# Altium PCB Rackmount_DSP.PcbDoc (part 17 of 24)
Units mil, origin at the board's own origin, x right, y up, seen from the top; angles counter-clockwise.
Board outline 10629.92 x 8267.72 mil, 4 copper layers (Top Layer, Mid Layer 1, Mid Layer 2, Bottom Layer), stack 36.2 mil thick; 4500 components, 1565 nets, 9765 pads, 3289 vias.
Unrouted connection lines stored in the file: 1.
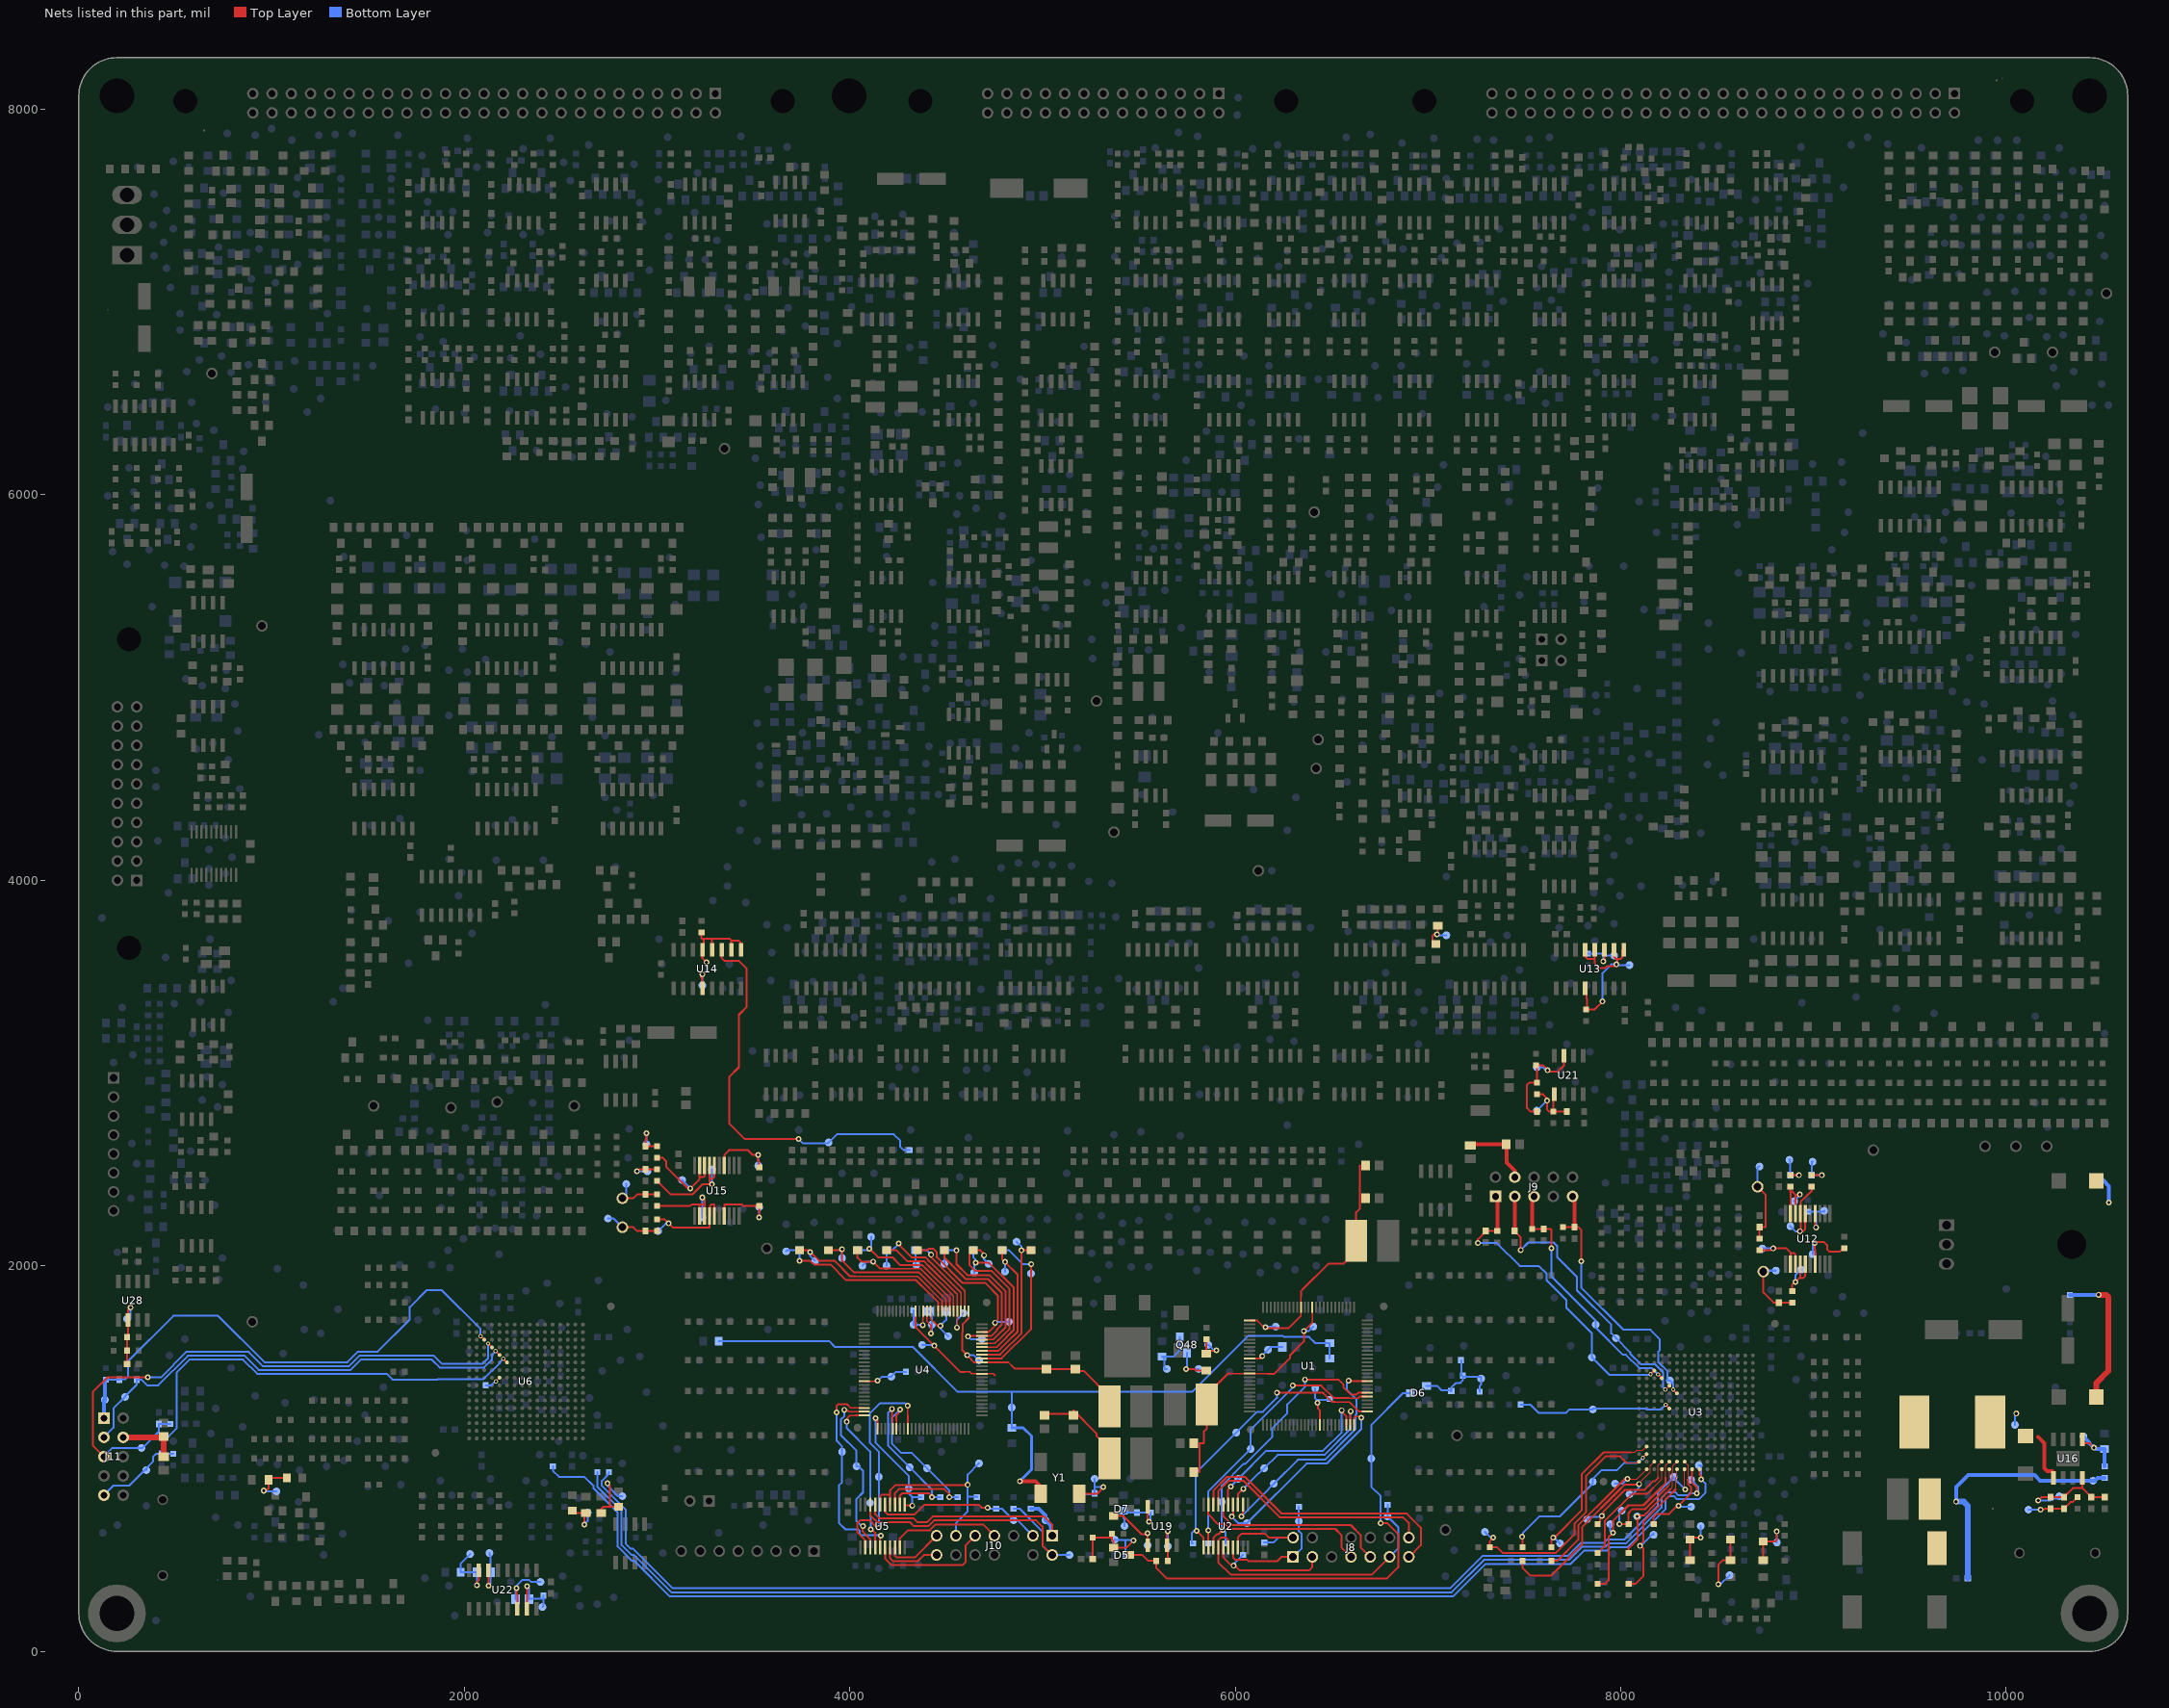
[diagram p19: the nets of this part, all layers, seen from the top]

## Via types
v1: diameter 30, hole 16, Top Layer to Bottom Layer, 3143 vias
v2: diameter 22, hole 12, Top Layer to Bottom Layer, 146 vias

## Nets (pads, with @x,y where several pads share a name; then routed paths per layer and width w, separated by ;. In a path a pad name is that pad's centre, name@x,y a point inside that pad or via, vN(x,y) a via of type N, cw(c..) or ccw(c..) an arc to the next point about the centre after c; other vN are vias at no path point) (continued)
XSIG030817: C20.1 TP852.1 U1.36 | length 197.6
  Top Layer w9: U1.36@6074.88,1519.37 6128.46,1519.37 v1(6140.23,1531.14)
  Bottom Layer w10: v1(6140.23,1531.14) 6140.23,1535.23 TP852.1@6170,1565 6185,1580 C20.1@6245,1580
XSIG030821: R605.1 TP853.1 U1.66 | length 269.2
  Top Layer w9: v1(6426.87,1289.61) 6429.2,1289.61 6429.2,1257.78 6439.06,1247.92 U1.66@6439.06,1174.88
  Bottom Layer w10: TP853.1@6415,1365 6415,1312.17 6423.6,1303.57 v1@6426.87,1303.57 ; v1(6426.87,1289.61) v1@6426.87,1303.57 ; R605.1@6490,1310 6489,1310 6482.57,1303.57 v1@6426.87,1303.57
XSIG030825: TP396.1 U1.84 U2.2 | length 1221.1
  Top Layer w9: v1(6587.74,1403.62) 6587.74,1401.26 U1.84@6685.12,1401.26
  Top Layer w10: v1(6031.94,700.58) 6039.57,708.21 U2.2@6039.57,761.61
  Bottom Layer w10: v1(6031.94,700.58) 6175.25,843.89 6175.25,845.25 TP396.1@6200,870 6324.12,994.12 6465.4,994.12 6623.73,1152.45 6623.73,1226.12 6629.21,1231.59 6629.21,1306.07 6579.48,1355.8 6579.48,1395.35 v1(6587.74,1403.62)
XSIG030826: TP395.1 U1.74 U2.3 | length 942.8
  Top Layer w9: U1.74@6596.54,1174.88 6596.54,1242.65 v1(6599.21,1245.32)
  Top Layer w10: U2.3@6013.98,761.61 6013.98,815.72 v1(6041.61,843.35)
  Bottom Layer w10: v1(6041.61,843.35) 6123.51,925.25 6125.25,925.25 TP395.1@6150,950 6219.49,1019.49 6462.49,1019.49 6596.24,1153.24 6596.24,1245.32 v1(6599.21,1245.32)
XSIG030827: TP394.1 U1.75 U2.4 | length 1095.6
  Top Layer w9: U1.75@6616.22,1174.88 6616.22,1211.96 6622.43,1218.17 6653.73,1218.17 v1(6653.73,1212.39)
  Top Layer w10: v1(5981.48,699.03) 5988.39,705.94 U2.4@5988.39,761.61
  Bottom Layer w10: v1(5981.48,699.03) 6015.51,665 TP394.1@6060,665 6369.12,974.12 6473.68,974.12 6653.73,1154.16 v1(6653.73,1212.39)
XSIG030828: TP854.1 U1.73 U2.5 | length 994.2
  Top Layer w9: v1(6552.43,1250.37) 6550.72,1250.37 6550.72,1245.02 6576.85,1218.88 U1.73@6576.85,1174.88
  Top Layer w10: U2.5@5962.8,761.61 5962.8,840.24 v1(5977.38,854.82)
  Bottom Layer w10: v1(5977.38,854.82) 5977.38,857.38 TP854.1@6015,895 6160.32,1040.32 6455.04,1040.32 6551.51,1136.79 6551.51,1250.37 v1(6552.43,1250.37)
XSIG030829: R21.2 TP393.1 U1.80 U2.12 | length 1507.4
  Top Layer w9: 6588.75,1313.39 6637.02,1313.39 6646.15,1322.52 U1.80@6685.12,1322.52
  Top Layer w10: U2.12@5860.43,538.39 v1(5860.43,627.11) ; v1(6298.05,1379.17) 6445.91,1379.17 6511.69,1313.39 6588.75,1313.39
  Bottom Layer w10: R21.2@5860,560 5860,593.34 5860.43,593.77 v1(5860.43,627.11) 5860.43,830.43 TP393.1@6080,1050 6080,1151.15 6298.05,1369.2 v1(6298.05,1379.17)
XSIG030830: R22.2 TP392.1 U1.81 U2.13 | length 1530.9
  Top Layer w9: 6588.61,1342.51 6598.72,1332.39 6629.15,1332.39 6638.96,1342.2 U1.81@6685.12,1342.2
  Top Layer w10: U2.13@5886.02,538.39 5886.02,589.39 5905.07,608.43 5914.3,608.43 v1(5935.51,629.64) ; v1(6361.67,1410.51) 6533.91,1410.51 6561.99,1382.43 6561.99,1369.12 6588.61,1342.51
  Bottom Layer w10: R22.2@5950,560 5950,615.15 v1(5935.51,629.64) 5930,629.64 TP392.1@5930,775 5930,859.5 6043,972.5 6052,972.5 6192,1112.5 6192,1158.06 6270,1236.06 6270,1281.29 6361.67,1372.96 v1(6361.67,1410.51)
XSIG030831: J8.11 R24.2 TP855.1 U2.14 U2.16 | length 1480.5
  Top Layer w10: U2.16@5962.8,538.39 5962.8,579.48 5952.89,589.39 5924.99,589.39 5911.61,576.01 U2.14@5911.61,538.39 5911.61,462.41 5975.84,398.18 6709.1,398.18 6800,489.07 J8.11@6800,490
  Bottom Layer w10: R24.2@6790,760 TP855.1@6790,700 6845,645 6845,535 J8.11@6800,490
XSIG030833: J8.1 R19.2 TP856.1 U2.17 | length 665
  Top Layer w10: U2.17@5988.39,538.39 5988.39,487.39 6001.49,474.28 6062.05,474.28 6068.83,467.5 6216.6,467.5 6239.1,490 J8.1@6300,490
  Bottom Layer w10: J8.1@6300,490 6345,535 6345,608.64 6330,623.64 TP856.1@6330,675 R19.2@6330,750
XSIG030835: J8.3 R23.2 TP857.1 U2.15 | length 678.6
  Top Layer w10: U2.15@5937.2,538.39 5937.2,487.39 5980.31,444.28 v1(5990.66,444.28) 5997.55,444.28 6021.35,420.49 6384.37,420.49 6400,436.12 J8.3@6400,490
  Bottom Layer w10: v1(5990.66,444.28) 5990.66,451.66 6039,500 R23.2@6040,500
XSIG030842: J8.7 TP858.1 U2.9 | length 919.2
  Top Layer w10: U2.9@5860.43,761.61 5860.43,710.61 5911.41,659.64 5947.94,659.64 5972.58,634.99 6173.42,634.99 ; 6173.43,635 6518.64,635 6550,603.64 6550,540 J8.7@6600,490
XSIG030843: J8.9 TP859.1 U2.6 | length 948.2
  Top Layer w10: U2.6@5937.2,761.61 5937.2,700.88 5983.09,654.99 6165.14,654.99 6598.64,655 6650,603.64 6650,540 J8.9@6700,490
XSIG030844: J8.13 TP860.1 U2.8 | length 1466.1
  Top Layer w10: U2.8@5886.02,761.61 5886.02,834.18 5956.67,904.82 6051.33,904.82 6241.39,714.76 6889.67,714.76 6962.53,641.9 6962.53,550.73 6901.8,490 J8.13@6900,490
XSIG030845: J8.14 TP861.1 U2.7 | length 1247.3
  Top Layer w10: U2.7@5911.61,761.61 5911.61,831.48 5964.96,884.82 6042.57,884.82 6232.63,694.76 6871.81,694.76 6900,666.57 J8.14@6900,590
XSIG030846: J8.2 R25.1 TP862.1 U2.18 | length 515.3
  Top Layer w10: U2.18@6013.98,538.39 6013.98,592.08 6031.28,609.39 6155.33,609.39 6174.71,590 J8.2@6300,590
  Bottom Layer w10: R25.1@6150,565 6197.77,565 6222.77,590 TP862.1@6300,590
XSIG030850: R20.1 TP391.1 U1.76 U2.11 | length 1607.5
  Top Layer w9: 6515.89,1293.38 6592.87,1293.38 6642.46,1243.78 U1.76@6685.12,1243.78
  Top Layer w10: v1(5798.78,625.42) 5834.84,589.39 U2.11@5834.84,538.39 ; v1(6215.45,1341.19) 6455.6,1341.19 6503.42,1293.38 6515.89,1293.38
  Bottom Layer w10: R20.1@5780,560 5775.02,560 5775.02,614.43 5786.01,625.42 v1@5795.17,625.42 ; v1(5798.78,625.42) v1@5795.17,625.42 ; v1(6215.45,1341.19) 6215.45,1314.88 6143.36,1242.79 6112.79,1242.79 TP391.1@6005,1135 5795.17,925.17 v1@5795.17,625.42
XSIG030853: C17.1 C38.1 L3.2 TP863.1 U1.12 U1.40 | length 1311.7
  Top Layer w9: 5974.88,1440.63 6040,1440.63 U1.40@6074.88,1440.63 6166.99,1440.63 6167.62,1440 6174.25,1440 ; v1(6355.44,1661.15) 6399.69,1705.39 U1.12@6399.69,1785.12
  Top Layer w10: 5815,930 5815,1080 5837.28,1080 5837.28,1141.1 5852.68,1156.5 L3.2@5852.68,1280 5852.68,1331.5 5961.81,1440.63 5974.88,1440.63 ; 6174.25,1440 6202.62,1440 6285,1522.38 6285,1536.65 6355.44,1607.09 v1(6355.44,1661.15)
  Bottom Layer w10: v1(6355.44,1661.15) 6381.15,1661.15 TP863.1@6405,1685
XSIG030857: C18.1 C19.1 L1.2 TP864.1 U1.15 U1.26 | length 1314.9
  Top Layer w9: U1.26@6074.88,1716.22 6113.97,1716.22 6149.24,1680.96 v1(6157.13,1680.96) 6157.13,1677.29 6276.8,1677.29 6340.63,1741.12 U1.15@6340.63,1785.12 6340.63,1835 6340.63,1843.31 6341.31,1843.99 6341.31,1869.2 6348.93,1876.82
  Top Layer w10: 6348.93,1876.82 6483.01,2010.89 6559.72,2010.89 6627.32,2078.5 L1.2@6627.32,2130 6627.32,2277.32 6645,2295 6645,2350 6645,2520
  Bottom Layer w10: v1(6157.13,1680.96) 6157.47,1680.96 6161.52,1685 TP864.1@6210,1685
XSIG040037: C359.1 J9.1 R862.1 TP390.1 U3.P3 | length 1647.3
  Top Layer w10: v1(7259,2118.44) 7259,2137.5 7300,2178.5 C359.1@7300,2180 R862.1@7360,2180 ; v2(8154.45,1437.28) 8158.62,1441.44 8158.62,1441.69 U3.P3@8173.46,1456.54
  Top Layer w20: J9.1@7350,2360 7360,2350 R862.1@7360,2180
  Bottom Layer w10: v1(7259,2118.44) 7357.58,2118.44 7476.36,1999.66 7574.84,1999.66 7615,1959.5 7615,1924.5 7717.45,1822.05 7717.45,1783.2 7850,1650.65 TP390.1@7850,1525 7939.84,1435.16 8154.45,1435.16 v2(8154.45,1437.28)
XSIG040039: C351.1 J9.5 R748.2 TP389.1 U3.N4 | length 1329
  Top Layer w10: R748.2@7540,2190 C351.1@7600,2190 7636.93,2190 7640,2186.93 v1(7640,2091) ; v2(8193.15,1436.85) U3.N4@8212.83,1417.17
  Top Layer w20: R748.2@7540,2190 7540,2350 J9.5@7550,2360
  Bottom Layer w10: v1(7640,2091) 7640,1944.3 7870,1714.3 TP389.1@7870,1695 7870,1680.5 8011.92,1538.58 8026.37,1538.58 8095.36,1469.59 8160.41,1469.59 v2(8193.15,1436.85)
XSIG040042: C352.1 J9.9 R704.2 TP388.1 U3.L6 | length 1412.1
  Top Layer w10: R704.2@7700,2200 C352.1@7760,2200 7780.86,2200 7794.39,2186.47 v1(7794.39,2023.4) ; v2(8271.89,1358.11) U3.L6@8291.57,1338.43
  Top Layer w20: J9.9@7750,2360 7760,2350 C352.1@7760,2200
  Bottom Layer w10: v1(7794.39,2023.4) 7794.39,1888.07 8014.61,1667.85 8153.55,1667.85 8201.13,1620.27 8201.13,1561.44 8194.51,1554.83 8194.51,1500.54 8242.82,1452.23 8242.82,1405 TP388.1@8255,1405 8271.89,1388.11 v2(8271.89,1358.11)
XSIG040044: C440.1 J9.3 TP399.1 U3.M5 | length 1552.7
  Top Layer w6: v2(8231.7,1357.85) 8238.21,1364.36 8238.77,1364.36 U3.M5@8252.2,1377.8
  Top Layer w10: C440.1@7450,2180 7450,2178.5 7481.39,2147.11 v1(7481.39,2082.29)
  Top Layer w20: C440.1@7450,2180 J9.3@7450,2360
  Bottom Layer w10: v1(7481.39,2082.29) 7520.1,2121 7652.43,2121 7670,2103.43 7670,2044.82 7772.6,1942.22 7772.6,1872.6 7950.25,1694.95 7950.25,1649.75 TP399.1@7975,1625 8049.04,1550.96 8049.04,1544.19 8103.64,1489.59 8177.18,1489.59 8219.59,1447.18 8219.59,1369.96 v2(8231.7,1357.85)
XSIG040070: C335.1 J9.4 L7.2 TP865.1 | length 382.5
  Top Layer w20: L7.2@7220,2624.5 7220,2630.92 7394.48,2630.92 7394.48,2630 C335.1@7405,2630 7407.65,2630 7407.65,2535.78 7450,2493.43 J9.4@7450,2460
XSIG040178: R875.2 TP1743.1 U3.K15 | length 528.4
  Top Layer w6: U3.K15@8330.94,984.09 8350.36,964.68 8350.36,931.61 8350,931.25 8350,891.95
  Top Layer w10: R875.2@8170,660 8170,697.27 8185.42,712.69 8250.82,712.69 8293.73,755.6 v1(8299.89,755.6) 8364.78,820.5 8364.78,835 8364.78,851.72 8351.34,865.16 8351.34,867.02 8350,868.36 8350,891.95
  Bottom Layer w10: v1(8299.89,755.6) 8305.5,750 TP1743.1@8365,750
XSIG040179: R877.2 TP1657.1 U3.L16 | length 843
  Top Layer w6: 8284.36,839.83 8286.55,842.02 8286.55,900.65 8291.57,905.67 U3.L16@8291.57,944.72
  Top Layer w10: R877.2@8040,350 8076.35,350 8117.5,391.15 8117.5,532.91 8103.69,546.72 v1(8099.88,546.72) 8099.88,553.9 8117.5,571.52 8117.5,672.97 8150,705.47 8150,705.56 8177.14,732.69 8177.22,732.69 8232.27,787.74 8232.27,787.88 8249.85,805.45 8249.98,805.45 8279.53,835 8284.36,839.83
  Bottom Layer w10: v1(8099.88,546.72) 8103.54,546.72 8170,613.18 TP1657.1@8170,605
XSIG040180: R879.2 TP1659.1 U3.L15 | length 627.8
  Top Layer w6: 8259.52,843.28 8268.67,852.44 8268.67,934.32 8271.2,936.85 8271.2,963.72 U3.L15@8291.57,984.09
  Top Layer w10: R879.2@8040,510 8040,534.31 8087.62,581.93 8087.62,681.46 8091.77,685.61 8091.77,697.01 8085,697.01 v1(8085,700) 8091.77,700 8091.77,705.54 8121.77,705.54 8130,713.77 8130,713.84 8168.85,752.69 8168.92,752.69 8212.27,796.04 8212.27,796.16 8241.56,825.45 8241.68,825.45 8251.23,835 8259.52,843.28
  Bottom Layer w10: TP1659.1@8085,690.24 TP1659.1@8089.88,695.12 ; v1(8085,700) 8085,697.01 8087.99,697.01 TP1659.1@8089.88,695.12 ; TP1659.1@8091.77,697.01 TP1659.1@8089.88,695.12
XSIG040181: R881.2 TP1658.1 U3.M16 | length 541.4
  Top Layer w6: 8242.35,854.58 8252.2,864.44 U3.M16@8252.2,944.72
  Top Layer w10: v1(7993.32,660) R881.2@8040,660 8040,717.56 8059.25,736.81 8124.58,736.81 8222.76,835 8242.35,854.58
  Bottom Layer w10: v1(7993.32,660) 7993.32,720.72 7998.8,726.2 7995,730 TP1658.1@8005,730
XSIG040182: R883.2 TP1660.1 U3.M15 | length 908.7
  Top Layer w6: 8232.83,903.46 8232.83,930.83 8233.2,931.2 8233.2,965.09 U3.M15@8252.2,984.09
  Top Layer w10: R883.2@7880,350 7918.25,350 7936.89,368.64 7936.89,592.55 v1(7959.04,614.7) 7959.04,677.01 8039.57,757.54 8117.02,757.54 8194.48,835 8232.83,873.36 8232.83,903.46
  Bottom Layer w10: TP1660.1@7945,660 7945,626.11 7956.42,614.7 v1(7959.04,614.7)
XSIG040183: R885.2 U3.N16 | length 619.1
  Top Layer w6: 8169.16,849.06 8212.83,892.73 U3.N16@8212.83,944.72
  Top Layer w10: R885.2@7880,510 7881,510 7916.89,545.89 7916.89,675.25 8059.87,818.23 8138.33,818.23 8155.1,835 8169.16,849.06
XSIG040184: R887.2 TP867.1 U3.N15 | length 621.7
  Top Layer w6: 8193.83,903.09 8193.83,965.09 U3.N15@8212.83,984.09
  Top Layer w10: R887.2@7880,660 7892.16,672.16 7892.16,688.98 7901.15,697.97 v1@7901.15,699.97 ; 8193.83,903.09 8193.83,899.19 8178.15,883.5 8169.16,883.5 8123.89,838.23 8022.35,838.23 8019.12,835 7908.93,724.81 7908.93,703 v1(7901.15,703) ; v1@7901.15,699.97 v1(7901.15,703) ; v1@7901.15,699.97 v1(7901.15,703)
  Bottom Layer w10: TP867.1@7825,685 7827.69,685 7829.16,683.52 7844.27,698.63 7901.15,698.63 7901.15,699.97 v1(7901.15,703)
XSIG040185: R886.2 TP868.1 U3.P15 | length 1142.7
  Top Layer w6: v1@8095.8,866.25 v1(8095.8,868.23) 8095.8,872.88 8153.09,930.18 8153.09,963.72 U3.P15@8173.46,984.09
  Top Layer w10: R886.2@7490,470 7490,434.56 7532.51,392.05 7637.72,392.05 7799.18,553.5 7799.18,644.33 7989.85,835 8019.09,864.24 8095.8,864.24 v1@8095.8,866.25
  Bottom Layer w10: TP868.1@8045,815 8060,815 8095.8,850.8 v1(8095.8,868.23)
XSIG040233: R876.1 TP398.1 U3.M8 | length 823.5
  Top Layer w10: v2(8232.52,1279.37) U3.M8@8252.2,1259.68
  Bottom Layer w10: R876.1@7480,1280 7530.28,1280 7572.51,1237.77 7716.9,1237.77 7734.13,1255 TP398.1@7855,1255 7855,1260 8130.44,1260 8137.07,1253.37 8206.52,1253.37 v2(8232.52,1279.37)
XSIG040238: D47.1 R1079.2 TP869.1 | length 268.9
  Top Layer w10: D47.1@8740,473.5 R1079.2@8740,570 8800.79,570 8809,578.21 v1(8809,621.42)
  Bottom Layer w10: v1(8809,621.42) 8810,620.42 TP869.1@8810,565
XSIG040265: R878.2 TP870.1 U3.R13 | length 892.2
  Top Layer w6: 8054.51,1032.67 8072.82,1032.67 8083.3,1043.15 8114.41,1043.15 U3.R13@8134.09,1062.83
  Top Layer w10: R878.2@7640,540 7640,581.31 v1(7649,590.31) 7655.66,590.31 7797.16,731.81 7797.16,917.59 7912.24,1032.67 7955,1032.67 8054.51,1032.67
  Bottom Layer w10: v1(7649,590.31) 7654.69,590.31 TP870.1@7685,560
XSIG040266: R880.2 TP397.1 U3.R14 | length 907
  Top Layer w10: v1(7487.27,593.95) 7490,593.95 R880.2@7490,540 ; v2(8114.41,1003.78) U3.R14@8134.09,1023.46
  Bottom Layer w10: v1(7487.27,593.95) 7490,593.95 7491.56,595.51 7491.56,614.4 7578.21,701.05 7685.08,701.05 7855,870.97 TP397.1@7855,880 7855.67,880 7856.12,880.45 7856.12,896.17 7898.61,938.66 7979.57,938.66 8016.94,976.03 8086.66,976.03 v2(8114.41,1003.78)
XSIG040267: R882.2 TP871.1 U3.T15 | length 1266.4
  Top Layer w6: 8028.62,979.63 8090.26,979.63 U3.T15@8094.72,984.09
  Top Layer w10: v1(7338.49,590.56) 7320,572.07 R882.2@7320,540 7358.06,540 7389.06,509 7661.21,509 7759.18,606.96 7759.18,662.1 7819.32,722.25 7819.32,909.19 7921.57,1011.43 7955,1011.43 7996.82,1011.43 8028.62,979.63
  Bottom Layer w10: TP871.1@7295,620 7324.44,590.56 v1(7338.49,590.56)
XSIG040268: R884.2 TP872.1 U3.R16 | length 808.9
  Top Layer w6: v1(8034.27,894.77) 8084.14,894.77 U3.R16@8134.09,944.72
  Top Layer w10: R884.2@7640,470 7670,470 7779.18,579.18 7779.18,653.72 7960.45,835 8020.22,894.77 v1(8034.27,894.77)
  Bottom Layer w10: TP872.1@7970,870 8009.5,870 v1(8034.27,894.77)
XSIG040270: R63.2 TP1740.1 U3.K16 | length 6451.4
  Top Layer w6: U3.K16@8330.94,944.72 8330.94,839.23 v1(8334.61,839.23)
  Bottom Layer w10: R63.2@2750,930 2750,921.29 2713.03,884.32 2713.03,859.15 2836.34,735.84 2836.34,558.67 2861.9,533.11 2874.68,533.11 3081.06,326.74 7114.68,326.74 7281.99,494.05 7723.77,494.05 7793.61,563.89 7912.82,563.89 7928.93,580 8017.19,580 8191,753.81 8191,821 TP1740.1@8271.92,901.92 ; TP1740.1@8275,905 8271.63,905 8271.63,902.21 TP1740.1@8271.92,901.92 ; v1(8334.61,839.23) TP1740.1@8271.92,901.92
XSIG040272: R62.2 TP1741.1 U3.J16 | length 6593.6
  Top Layer w10: U3.J16@8370.32,944.72 8370.32,876.33 8371.34,875.31 8371.34,873.45 8394.78,850.01 8394.78,835 v1(8394.78,819.85)
  Bottom Layer w10: R62.2@2690,930 2690,853.89 2815.51,728.38 2815.51,551.22 2867.61,499.12 2880.39,499.12 3073.66,305.85 7122.39,305.85 7290.59,474.05 7732.05,474.05 7801.89,543.89 7921.11,543.89 7937.22,560 8025.47,560 8211,745.53 8211,794.89 8241.56,825.45 8282.98,825.45 8299.21,809.23 8347.04,809.23 8357.66,819.85 v1(8394.78,819.85) 8401.24,819.85 8401.24,853.76 TP1741.1@8365,890
XSIG040274: R61.2 TP1742.1 U3.H16 | length 6869.5
  Top Layer w10: U3.H16@8409.68,944.72 8409.68,915.4 8419.37,905.72 8419.37,895.33 8417.34,893.3 v1(8417.34,892.5)
  Bottom Layer w10: R61.2@2460,960 2460,936.27 2490.66,905.61 2622.32,905.61 2670,857.93 2670,845.61 2795.51,720.1 2795.51,542.93 2868.3,470.14 2880.72,470.14 3065.9,284.96 7130.11,284.96 7298.8,453.65 7739.94,453.65 7810.18,523.89 7929.39,523.89 7945.5,540 8033.76,540 8232.27,738.51 8232.27,787.88 8249.85,805.45 8274.7,805.45 8290.92,789.23 8406.59,789.23 8438.55,821.19 8438.55,871.29 v1(8417.34,892.5) 8417.34,965 TP1742.1@8405,965
XSIG050823: R606.2 TP873.1 U4.34 | length 981.1
  Top Layer w9: v1(3739.07,2025.97) 3795.72,2025.97 3814.77,2006.92 3899.53,2006.92 3980.46,1925.99 4278.45,1925.99 4279.03,1925.41 ; 4409.31,1859.8 4458.74,1810.36 4458.74,1810 U4.34@4458.74,1765.12
  Top Layer w10: 4279.03,1925.41 4279.03,1925.69 4343.41,1925.69 4409.31,1859.8
  Bottom Layer w10: TP873.1@3670,2075 3675,2080 R606.2@3740,2080 3740,2026.9 v1(3739.07,2025.97)
XSIG050824: R607.2 TP874.1 U4.33 | length 956.8
  Top Layer w9: 4028.29,1945.49 4351.18,1945.49 4478.43,1818.25 4478.43,1810 U4.33@4478.43,1765.12
  Top Layer w10: R607.2@3740,2080 3785.56,2080 v1(3794.36,2071.2) 3839.14,2026.42 3920.49,2026.42 4001.41,1945.49 4028.29,1945.49
  Bottom Layer w10: v1(3794.36,2071.2) 3794.36,2050.64 TP874.1@3820,2025
XSIG050825: R608.2 TP875.1 U4.32 | length 860.4
  Top Layer w9: 4479.5,1844.75 4498.11,1826.15 4498.11,1810 U4.32@4498.11,1765.12
  Top Layer w10: R608.2@3890,2080 3953.67,2080 v1(3960,2086.33) 3960,2027.36 4021.86,1965.49 4090.79,1965.49 4090.91,1965.37 4358.88,1965.37 4479.5,1844.75
  Bottom Layer w10: TP875.1@3960,2040 v1(3960,2086.33)
XSIG050826: R609.2 TP876.1 U4.31 | length 736.6
  Top Layer w9: 4215.34,1985.37 4215.34,1984.99 4367.55,1984.99 4403,1949.54 ; 4504,1848.54 4517.8,1834.75 4517.8,1810 U4.31@4517.8,1765.12
  Top Layer w10: R609.2@4040,2080 4040,2042.3 4060.73,2021.57 4120.52,2021.57 v1(4120.52,2022.01) 4157.15,1985.37 4215.34,1985.37 ; 4403,1949.54 4504,1848.54
  Bottom Layer w10: TP876.1@4065,2000 4087.01,2022.01 v1(4120.52,2022.01)
XSIG050827: R610.2 TP877.1 U4.30 | length 745.7
  Top Layer w9: 4526.68,1854.14 4537.48,1843.34 4537.48,1810 U4.30@4537.48,1765.12
  Top Layer w10: v1(4101.32,2089.36) 4146.78,2043.89 4221.15,2043.89 4260.55,2004.49 4375.62,2004.49 4399.36,1980.75 4400.07,1980.75 4526.68,1854.14
  Bottom Layer w10: R610.2@4040,2080 4091.96,2080 v1(4101.32,2089.36) 4110,2098.04 TP877.1@4110,2150
XSIG050828: R611.2 TP878.1 U4.29 | length 724.4
  Top Layer w9: 4546.95,1862.16 4557.17,1851.94 4557.17,1810 U4.29@4557.17,1765.12 4557.17,1679.97 v1(4555.64,1679.97)
  Top Layer w10: R611.2@4190,2080 4242.56,2080 4298.07,2024.49 4383.91,2024.49 4407.65,2000.75 4408.36,2000.75 4546.95,1862.16
  Bottom Layer w10: v1(4555.64,1679.97) 4555.64,1720.64 TP878.1@4590,1755
XSIG050829: R612.2 TP879.1 U4.28 | length 685.7
  Top Layer w9: 4567.3,1870.09 4576.85,1860.54 4576.85,1810 U4.28@4576.85,1765.12
  Top Layer w10: v1(4254.25,2115.71) 4254.25,2110.64 4320.11,2044.78 4391.91,2044.78 4415.93,2020.75 4416.64,2020.75 4567.3,1870.09
  Bottom Layer w10: TP879.1@4190,2000 R612.2@4190,2080 4218.55,2080 v1(4254.25,2115.71)
XSIG050830: R613.2 TP880.1 U4.27 | length 536.3
  Top Layer w9: U4.27@4596.54,1765.12 4596.54,1810 4596.54,1865.12
  Top Layer w10: v1(4421.64,2057.47) 4421.64,2044.04 4596.54,1869.14 4596.54,1865.12
  Bottom Layer w10: TP880.1@4345,2005 4340,2005 R613.2@4340,2080 4400.03,2080 4421.64,2058.39 v1(4421.64,2057.47)
XSIG050831: R614.2 TP881.1 U4.20 | length 851.2
  Top Layer w9: U4.20@4685.12,1597.8 4730,1597.8 4752.79,1597.8 4768.96,1613.96
  Top Layer w10: v1(4696.39,2054.55) 4696.39,2061.11 4677.5,2080 R614.2@4640,2080 4637.5,2080 4620.16,2062.66 4620.16,2005.54 4652.75,1972.95 4736.06,1972.95 4828.57,1880.43 4828.57,1673.57 4768.96,1613.96
  Bottom Layer w10: v1(4696.39,2054.55) 4696.39,2033.61 TP881.1@4720,2010
XSIG050832: R615.2 TP882.1 U4.21 | length 853.9
  Top Layer w9: U4.21@4685.12,1617.48 4730,1617.48 4744.2,1617.48 4769.12,1642.4
  Top Layer w10: v1(4553.2,2080) 4553.2,2008.77 4610.4,1951.57 4724.53,1951.57 4808.39,1867.71 4808.39,1681.67 4769.12,1642.4
  Bottom Layer w10: TP882.1@4490,2010 R615.2@4490,2080 v1(4553.2,2080)
XSIG050833: R616.2 TP883.1 U4.22 | length 854.9
  Top Layer w9: v1(4613.9,1633.05) 4618.02,1637.17 U4.22@4685.12,1637.17 4730,1637.17 4736.3,1637.17 4763.88,1664.74 4763.88,1667.39
  Top Layer w10: R616.2@4490,2080 4490,2043.68 4602.48,1931.2 4716.39,1931.2 4787.9,1859.69 4787.9,1694.98 4763.88,1670.96 4763.88,1667.39
  Bottom Layer w10: v1(4613.9,1633.05) 4626.95,1620 TP883.1@4685,1620
XSIG050834: R617.2 TP884.1 U4.23 | length 866.3
  Top Layer w9: U4.23@4685.12,1656.85 4721.37,1656.85 4730,1665.48 4758.47,1693.95 v1@4747.2,1705.22
  Top Layer w10: R617.2@4350,2080 4401.74,2080 4409.22,2087.47 4434.07,2087.47 4451.64,2069.9 4451.64,2044.29 4585.66,1910.28 4703.36,1910.28 4767.21,1846.43 4767.21,1718.61 v1(4753.82,1705.22) v1@4747.2,1705.22
  Bottom Layer w10: v1(4753.82,1705.22) 4758.6,1710 TP884.1@4825,1710
XSIG050835: R618.2 TP885.1 U4.16 | length 886.3
  Top Layer w9: U4.16@4685.12,1519.06 4730,1519.06 4787.19,1519.06 4787.51,1519.37
  Top Layer w10: 4787.51,1519.37 4941.43,1673.29 v1(4941.43,2008.96)
  Bottom Layer w10: R618.2@4790,2080 4826.15,2080 4897.19,2008.96 v1(4941.43,2008.96) 4941.43,1996.43 4940,1995 TP885.1@4940,1960
XSIG050836: R624.2 TP886.1 U4.17 | length 786.1
  Top Layer w9: U4.17@4685.12,1538.74 4730,1538.74 4778.59,1538.74 4781.86,1542
  Top Layer w10: 4781.86,1542 4890.74,1650.88 v1(4890.74,2080) R624.2@4940,2080
  Bottom Layer w10: TP886.1@4865,2125 4890.74,2099.26 v1(4890.74,2080)
XSIG050837: R623.2 TP887.1 U4.18 | length 731.4
  Top Layer w9: U4.18@4685.12,1558.43 4730,1558.43 4769.99,1558.43 4810.05,1598.48
  Top Layer w10: R623.2@4790,2080 4790,2035.12 v1(4805,2020.12) 4870.38,1954.74 4870.38,1658.81 4810.05,1598.48
  Bottom Layer w10: TP887.1@4805,1970 v1(4805,2020.12)
XSIG050838: R625.2 TP888.1 U4.19 | length 796.5
  Top Layer w9: U4.19@4685.12,1578.11 4730,1578.11 4761.39,1578.11 4773.26,1589.97
  Top Layer w10: v1(4652.98,2015.69) 4721.92,2015.69 4850.34,1887.28 4850.34,1667.05 4773.26,1589.97
  Bottom Layer w10: R625.2@4640,2080 4640,2045 4651.77,2033.23 4651.77,2016.91 v1(4652.98,2015.69) 4645,2007.71 TP888.1@4645,1965
XSIG050924: R626.1 TP889.1 U4.38 | length 197.8
  Top Layer w9: v1(4379.14,1692.76) 4380,1693.62 U4.38@4380,1765.12
  Bottom Layer w10: R626.1@4330,1770 TP889.1@4330,1695 4376.9,1695 v1(4379.14,1692.76)
XSIG050925: C340.1 TP423.1 U4.37 | length 247.6
  Top Layer w9: U4.37@4399.69,1765.12 4399.69,1713.93 4420.92,1692.69 v1(4420.92,1649.63)
  Bottom Layer w10: C340.1@4410,1765 4425,1750 TP423.1@4425,1695 4425,1653.71 v1(4420.92,1649.63)
XSIG050926: C339.1 TP890.1 U4.36 | length 264.9
  Top Layer w9: U4.36@4419.37,1765.12 4419.37,1724.03 4453.64,1689.75 v1(4470,1689.75)
  Bottom Layer w10: C339.1@4500,1765 4500,1719.75 v1(4470,1689.75) 4470,1675 TP890.1@4510,1635
XSIG050930: R782.2 TP891.1 U4.66 | length 235.4
  Top Layer w9: U4.66@4074.88,1400.94 4139.86,1400.94 v1(4143.48,1404.57)
  Bottom Layer w10: v1(4143.48,1404.57) 4147.1,1404.57 4167.54,1425 TP891.1@4215,1425 4240,1450 R782.2@4290,1450
XSIG050934: TP422.1 U4.84 U5.2 | length 1245.5
  Top Layer w9: v1(4299.95,1275.04) 4299.95,1225.64 4301.26,1224.33 U4.84@4301.26,1154.88
  Top Layer w10: U5.2@4080.43,538.39 4080.43,576.01 4037.85,618.59 4037.85,662.72 4055.42,680.29 4102.74,680.29 4142.99,640.04 v1(4149.98,640.04)
  Bottom Layer w10: v1(4149.98,640.04) 4160.7,650.77 4160.7,656.15 4150,666.85 TP422.1@4150,905 4150,1035.5 4103.96,1081.54 4103.96,1235.73 4156.42,1288.18 4286.81,1288.18 v1(4299.95,1275.04)
XSIG050935: TP421.1 U4.74 U5.3 | length 938.2
  Top Layer w9: v1(3971.63,1253) 3985.77,1253 3995.3,1243.46 4040,1243.46 U4.74@4074.88,1243.46
  Top Layer w10: v1(4067.85,650.29) 4065,647.44 4065,645.53 4065,623.14 4106.02,582.11 U5.3@4106.02,538.39
  Bottom Layer w10: v1(3971.63,1253) 3971.63,1221.32 3953.77,1203.47 3953.77,1121.13 4035,1039.9 TP421.1@4035,960 4045.38,960 4068.8,936.57 4068.8,824.86 4035,791.05 4035,675.53 4065,645.53 4067.85,648.38 v1(4067.85,650.29)
XSIG050936: TP420.1 U4.75 U5.4 | length 834
  Top Layer w9: v1(3983.77,1191.04) 3987.89,1191.04 3987.89,1211.78 3999.61,1223.5 4030.6,1223.5 4030.88,1223.78 4040,1223.78 U4.75@4074.88,1223.78
  Top Layer w10: v1(4108.55,632.05) 4108.55,631.54 4114.24,631.54 4131.61,614.17 U5.4@4131.61,538.39
  Bottom Layer w10: v1(3983.77,1191.04) 3983.77,1157.45 4105,1036.22 TP420.1@4105,770 4105,700.3 4108.55,696.75 v1(4108.55,632.05)
XSIG050937: TP419.1 U4.73 U5.5 | length 1100.7
  Top Layer w9: 3989.39,1277.66 4003.9,1263.15 4040,1263.15 U4.73@4074.88,1263.15
  Top Layer w10: v1(3931.63,1239.25) 3931.63,1274.63 3939.99,1283 3984.05,1283 3989.39,1277.66 ; U5.5@4157.2,538.39 4157.2,595.4 v1(4161.84,600.04)
  Bottom Layer w10: v1(3931.63,1239.25) 3931.63,1092.3 3959.65,1064.28 TP419.1@3959.65,1035 ; TP419.1@3960,1035 TP419.1@3959.65,1035 ; v1(4161.84,600.04) 4159.83,602.05 4057.95,602.05 4052.05,607.96 4052.05,623.67 4043.21,632.5 3976.88,632.5 3943.54,665.83 3943.54,860.56 3959.65,876.67 TP419.1@3959.65,1035
XSIG050938: R629.2 TP418.1 U4.80 U5.12 | length 937.7
  Top Layer w9: v1(4218.65,1258.18) 4218.65,1208.61 4222.52,1204.74 U4.80@4222.52,1154.88
  Top Layer w10: U5.12@4259.57,761.61 4259.57,807.58 4270.88,818.89 4412.75,818.89 4425.94,805.71 v1(4425.94,800)
  Bottom Layer w10: v1(4218.65,1258.18) 4218.32,1258.18 4199,1238.86 4199,1066 TP418.1@4310,955 4425.94,839.06 v1(4425.94,800) R629.2@4470,800
XSIG050939: R627.2 TP417.1 U4.81 U5.13 | length 1156.7
  Top Layer w9: U4.81@4242.2,1154.88 4242.2,1198.88 4241.52,1199.57 4241.52,1226.29 4261.26,1246.03 v1(4261.26,1254.66)
  Top Layer w10: U5.13@4233.98,761.61 4233.98,821.86 4254,841.88 4490.19,841.88 4516.87,815.21 v1(4516.87,800)
  Bottom Layer w10: v1(4261.26,1254.66) 4219,1212.4 4219,1076.29 4266.54,1028.75 4321.25,1028.75 TP417.1@4400,950 4516.87,833.13 v1(4516.87,800) R627.2@4560,800
XSIG050940: J10.11 R715.2 TP416.1 U5.14 U5.16 | length 1064.7
  Top Layer w10: U5.16@4157.2,761.61 4157.2,804.04 4165.78,812.61 4208.39,812.61 ; U5.14@4208.39,761.61 4208.39,812.61 ; v1(4611.86,863.95) 4611.86,862.56 4237.01,862.56 4208.39,833.94 4208.39,812.61
  Bottom Layer w10: J10.11@4550,600 4550,663.93 4609.93,723.86 4609.93,801.87 ; R715.2@4660,800 4660,801.87 4609.93,801.87 ; TP416.1@4670,975 4611.86,916.86 v1(4611.86,863.95) 4609.57,863.95 4609.57,801.87 4609.93,801.87
XSIG050942: J10.1 R718.2 TP415.1 U5.17 | length 1283.2
  Top Layer w10: U5.17@4131.61,761.61 4131.61,710.61 4151.69,690.53 4329.75,690.53 4351.15,669.14 4398.93,669.14 4429.34,699.55 5008.34,699.55 5050,657.89 J10.1@5050,600
  Bottom Layer w20: R718.2@4940,740 4979.9,740 5015,704.9 TP415.1@5015,680 5042.25,652.75 5042.25,607.75 J10.1@5050,600
XSIG050944: J10.3 R716.2 TP414.1 U5.15 | length 900.4
  Top Layer w10: U5.15@4182.8,761.61 4182.8,723.99 4196.17,710.61 4336.59,710.61 4386.85,760.87 4668.65,760.87 4684.51,745.01 v1(4714.51,745.01)
  Bottom Layer w10: v1(4714.51,745.01) 4719.52,740 R716.2@4760,740 4790,740 TP414.1@4848.17,681.83 ; TP414.1@4850,680 TP414.1@4848.17,681.83 ; J10.3@4950,600 4868.17,681.83 TP414.1@4848.17,681.83
XSIG050951: J10.7 TP892.1 U5.9 | length 592.6
  Top Layer w10: U5.9@4259.57,538.39 4259.57,586.13 4302.12,628.68 4415.04,628.68 4445.18,658.82 4691.18,658.82 J10.7@4750,600
XSIG050952: J10.9 TP893.1 U5.6 | length 654.1
  Top Layer w10: U5.6@4182.8,538.39 4182.8,480.86 4216.98,446.67 4584.92,446.67 4601.42,463.17 4601.42,551.42 J10.9@4650,600
XSIG050953: J10.13 TP894.1 U5.8 | length 314.3
  Top Layer w10: U5.8@4233.98,538.39 4233.98,494.86 4241.45,487.39 4337.39,487.39 J10.13@4450,600
  Bottom Layer w10: J10.13@4450,600 TP894.1@4455,600
XSIG050954: J10.14 TP895.1 U5.7 | length 317.2
  Top Layer w10: U5.7@4208.39,538.39 4208.39,483.55 4225.27,466.67 4350.98,466.67 4384.3,500 J10.14@4450,500
XSIG050955: J10.2 R717.1 TP896.1 U5.18 | length 1597.3
  Top Layer w10: U5.18@4106.02,761.61 4106.02,706.5 4142.48,670.04 4311.69,670.04 4332.61,649.12 4407.19,649.12 4437.44,679.37 4967.25,679.37 5000,646.61 5000,550 J10.2@5050,500
  Bottom Layer w10: R717.1@4850,740 4881,740 5000,621 5000,550 J10.2@5050,500 TP896.1@5140,500
XSIG050959: R628.1 TP430.1 U4.76 U5.11 | length 680.9
  Top Layer w9: v1(4133.96,1209.51) 4143.78,1199.7 U4.76@4143.78,1154.88
  Top Layer w10: U5.11@4285.16,761.61 4285.16,757.77 4322.46,757.77 v1(4324.31,755.93)
  Bottom Layer w10: v1(4133.96,1209.51) 4133.96,1081.54 4305,910.5 TP430.1@4305,845 4305,820.03 4325.03,800 ; v1(4324.31,755.93) 4324.31,800 4325.03,800 ; R628.1@4370,800 4325.03,800
XSIG050961: C332.1 C333.1 L5.2 TP897.1 U4.15 U4.26 | length 1212.3
  Top Layer w9: 4585.87,1682.45 4585.87,1698.72 ; v1(4609.24,1536.26) 4630.1,1515.4 4630.1,1512.91 4643.64,1499.37 U4.15@4685.12,1499.37 4730,1499.37 4822.81,1499.37 4846.87,1475.31 ; 4616.22,1729.07 U4.26@4616.22,1765.12
  Top Layer w10: 4585.87,1682.45 4586.12,1682.45 4586.12,1656.94 4583.8,1654.62 4583.8,1561.7 v1(4609.24,1536.26) ; 4585.87,1698.72 4616.22,1729.07 ; 4846.87,1475.31 4854.54,1467.64 5020,1467.64 C333.1@5020,1465 5020,1464.92 C332.1@5170,1464.92 ; C332.1@5170,1465 C332.1@5170,1464.92 ; L5.2@5347.32,1270 5347.32,1321.5 5213.88,1454.94 5170,1454.94 C332.1@5170,1464.92
  Bottom Layer w10: v1(4609.24,1536.26) 4643.74,1536.26 TP897.1@4670,1510
XSIG050964: C330.1 C331.1 L4.2 TP898.1 U4.12 U4.40 | length 1175
  Top Layer w9: U4.40@4340.63,1765.12 4340.63,1682.59 v1(4437.78,1585.45) 4574.54,1448.68 4596.95,1448.68 4598.4,1450.13 4622.84,1450.13 4632.47,1440.5 4640.93,1440.5 4641.12,1440.32 U4.12@4685.12,1440.32 4730,1440.32 4744.7,1440.32 4753.89,1431.13
  Top Layer w10: C331.1@5010,1225 5010,1231.57 C330.1@5160,1231.57 ; C330.1@5160,1225 C330.1@5160,1231.57 ; L4.2@5347.32,1000 5347.32,1051.5 5279.72,1119.11 5279.72,1130.28 5160,1250 C330.1@5160,1231.57
  Bottom Layer w10: TP898.1@4375,1590 4433.22,1590 v1(4437.78,1585.45)
XSIG060040: C360.1 J11.1 R863.1 TP429.1 U6.P3 | length 2776.2
  Top Layer w10: v2(2083.78,1636.22) U6.P3@2103.46,1616.54
  Bottom Layer w10: R863.1@140,1410 C360.1@210,1410 210,1412.23 241.6,1412.23 255,1425.63 255,1505.63 490.46,1741.09 722.23,1741.09 963.32,1500 1393.41,1500 1448.46,1555.05 1550.36,1555.05 1716.84,1721.54 1716.84,1785.78 1804.76,1873.71 1883.06,1873.71 2083.78,1672.99 v2(2083.78,1636.22)
  Bottom Layer w20: J11.1@130,1210 130,1305 TP429.1@135,1305 135,1405 R863.1@140,1410
XSIG060042: C441.1 J11.3 TP428.1 U6.M5 | length 2459.2
  Top Layer w10: v2(2162.52,1557.48) U6.M5@2182.2,1537.8
  Bottom Layer w10: J11.3@130,1110 180,1160 180,1260 TP428.1@240,1320 240,1320.41 238.62,1321.79 300,1383.17 C441.1@300,1410 323.81,1410 353.81,1380 412.13,1380 565.39,1533.26 859.86,1533.26 933.12,1460 1409.98,1460 1465.03,1515.05 1828.39,1515.05 1871.33,1472.11 2102.83,1472.11 2143.15,1512.43 2143.15,1538.11 v2(2162.52,1557.48)
XSIG060043: C353.1 J11.5 R749.2 TP427.1 U6.N4 | length 3122.4
  Top Layer w10: J11.5@130,1010 72.34,1067.66 72.34,1345.89 147.71,1421.26 v1(356.82,1421.26) ; v2(2123.15,1596.85) U6.N4@2142.83,1577.17
  Bottom Layer w10: J11.5@130,1010 175,1055 TP427.1@325,1055 330.55,1055 415,1139.45 C353.1@415,1180 R749.2@475,1180 ; v1(356.82,1421.26) 425.11,1421.26 557.11,1553.26 880.78,1553.26 954.04,1480 1401.69,1480 1456.75,1535.05 1839.56,1535.05 1882.51,1492.11 2094.55,1492.11 2123.15,1520.71 v2(2123.15,1596.85)
XSIG060051: C334.1 J11.4 L8.2 TP899.1 | length 317.6
  Top Layer w30: J11.4@230,1110 435,1110 C334.1@440,1115 L8.2@440,1009.5
XSIG060053: C354.1 J11.9 R691.2 TP426.1 U6.L6 | length 2762.8
  Top Layer w10: v2(2201.89,1518.11) U6.L6@2221.57,1498.43
  Bottom Layer w10: J11.9@130,810 180,860 260.53,860 TP426.1@345.26,944.74 ; TP426.1@350,940 TP426.1@345.26,944.74 ; R691.2@490,1025 C354.1@430,1025 ; v2(2201.89,1518.11) 2183.51,1499.73 2183.51,1496.21 2099.48,1412.18 1863.33,1412.18 1861.14,1410 1626.75,1410 1596.75,1440 924.84,1440 851.58,1513.26 573.68,1513.26 508.15,1447.73 508.15,1157.73 430,1079.58 C354.1@430,1025 ; TP426.1@345.26,944.74 384.76,984.23 384.76,1007.45 402.3,1025 C354.1@430,1025
XSIG060060: R874.1 U6.M8 | length 93.1
  Top Layer w6: v2(2163.51,1399.8) 2163.51,1400.99 U6.M8@2182.2,1419.68
  Bottom Layer w10: R874.1@2110,1380 2140.04,1380.04 2162.46,1402.46 2163.51,1402.46 v2(2163.51,1399.8)
XSIG060242: D48.1 R1080.2 TP900.1 | length 246.4
  Top Layer w10: v1(959.9,833.67) 972.13,833.67 983.5,845.04 D48.1@983.5,890 983.5,900 R1080.2@1080,900
  Bottom Layer w10: v1(959.9,833.67) 963.57,830 TP900.1@1025,830
XSIG070200: R858.2 TP425.1 U14.1 U14.2 U14.4 U14.5 U14.12 | length 729.5
  Top Layer w10: R858.2@3230,3730 3230,3700 3235.26,3694.74 3241.5,3694.74 ; U14.12@3235,3440 3235,3490 3229.47,3495.53 3229.47,3505.53 v1(3235.48,3511.54) ; U14.5@3235,3640 U14.5@3235.14,3640 ; v1(3256.24,3574.17) 3235.14,3595.27 U14.5@3235.14,3640 ; U14.4@3285,3640 3285,3696.06 ; U14.2@3385,3640 3385,3687.39 ; U14.1@3435,3640 3435,3676.17 3423.77,3687.39 3385,3687.39 ; U14.5@3235.14,3640 3241.5,3640 3241.5,3694.74 ; 3241.5,3694.74 3241.5,3696.06 3285,3696.06 ; 3285,3696.06 3285,3697.8 3375.56,3697.8 3385,3688.36 3385,3687.39
  Bottom Layer w10: TP425.1@3235,3455 3235,3490 3235.48,3490.48 v1(3235.48,3511.54) 3235.48,3512.44 3256.24,3533.2 v1(3256.24,3574.17)
XSIG070205: R913.1 TP424.1 U14.3 | length 2088.6
  Top Layer w10: U14.3@3335,3640 3335.33,3640 3335.33,3596.82 3349.09,3583.06 3423.7,3583.06 3465,3541.76 3465,3343.1 3424.29,3302.39 3424.29,3030.2 3373.71,2979.63 3373.71,2739.3 3455.48,2657.54 v1(3734.71,2657.54)
  Bottom Layer w10: v1(3734.71,2657.54) 3757.25,2635 3885,2635 TP424.1@3890,2640 3932.71,2682.71 4228.41,2682.71 4261.54,2649.58 4261.54,2617.46 4279,2600 R913.1@4310,2600
XSIG070217: R859.2 TP901.1 U13.1 U13.2 U13.4 U13.5 U13.12 | length 1005.5
  Top Layer w10: U13.12@7815,3440 7821.5,3440 7821.5,3387.13 7825.47,3383.16 R859.2@7825.47,3330 ; U13.5@7815,3640 7815,3605.53 7829.49,3591.04 7865,3591.04 ; R859.2@7820,3330 R859.2@7825.47,3330 ; U13.4@7865,3640 7865,3591.04 ; v1(7905.4,3371.13) 7864.27,3330 R859.2@7825.47,3330 ; U13.2@7965,3640 7965,3602.17 7975.1,3592.07 7981.68,3592.07 ; v1(7977.94,3563.65) v1@7969.51,3555.22 ; U13.1@8015,3640 8007.85,3640 8007.85,3601.54 7998.37,3592.07 7981.68,3592.07 ; 7865,3591.04 7865,3567.82 7887.05,3545.76 7918.47,3545.76 7927.93,3555.22 v1@7969.51,3555.22 ; v1@7969.51,3555.22 7981.68,3555.22 7981.68,3592.07
  Bottom Layer w10: v1(7905.4,3371.13) 7905.4,3518.54 7950.52,3563.65 v1(7977.94,3563.65) 7977.94,3560 TP901.1@8045,3560
XSIG070221: R926.1 TP1609.1 U13.3 | length 236.9
  Top Layer w10: v1(7908.64,3579.24) 7908.64,3585.93 7915,3585.93 U13.3@7915,3640
  Bottom Layer w10: R926.1@7830,3620 7897.88,3620 7908.64,3609.24 ; v1(7908.64,3579.24) 7908.64,3609.24 ; TP1609.1@7965,3610 7909.4,3610 7908.64,3609.24
XSIG070246: R895.1 TP903.1 U12.2 U12.3 | length 368.2
  Top Layer w10: R895.1@8720,2080 8780.21,2080 v1(8790.21,2090) 8859.13,2090 8881.8,2067.33 ; U12.2@8880.43,2008.7 8880.43,2065.96 8881.8,2067.33 ; U12.3@8906.02,2008.7 8906.02,2059.83 8898.52,2067.33 8881.8,2067.33
  Bottom Layer w10: TP903.1@8735,2090 v1(8790.21,2090)
XSIG070248: R896.1 TP904.1 U12.4 U12.5 | length 329.7
  Top Layer w10: R896.1@8890,1870 8890,1902.19 8904.82,1917.01 v1(8906.43,1917.01) 8931.61,1942.2 ; U12.4@8931.61,2008.7 8931.61,1942.2 ; U12.5@8957.2,2008.7 8957.2,1948.43 8944.24,1935.47 8931.61,1935.47 8931.61,1942.2
  Bottom Layer w10: v1(8906.43,1917.01) 8906.43,1951.43 TP904.1@8935,1980
XSIG070250: R897.1 TP905.1 U12.16 U12.17 | length 427
  Top Layer w10: v1(8929.86,2179.64) 8931.61,2181.39 8931.61,2181.82 v1@8933.02,2181.82 ; U12.17@8931.61,2271.3 U12.17@8933.02,2271.3 ; U12.16@8957.2,2271.3 8957.2,2189.55 8949.47,2181.82 v1@8933.02,2181.82 ; R897.1@8990,2410 8990,2388.28 8933.02,2331.3 U12.17@8933.02,2271.3 ; v1@8933.02,2181.82 U12.17@8933.02,2271.3
  Bottom Layer w10: TP905.1@8880,2205 8905.36,2179.64 v1(8929.86,2179.64)
XSIG070252: R898.1 TP906.1 U12.18 U12.19 | length 348.8
  Top Layer w10: R898.1@8880,2410 8880,2382.15 8880.43,2382.15 ; U12.19@8880.43,2271.3 8880.43,2382.15 ; U12.18@8906.02,2271.3 8906.02,2356.91 ; v1(8929.29,2370) 8919.12,2370 8906.02,2356.91 ; 8880.43,2382.15 8880.43,2384.67 8890.8,2384.67 8906.02,2369.44 8906.02,2356.91
  Bottom Layer w10: TP906.1@8900,2335 8902.12,2335 8902.12,2339.36 8929.29,2366.53 v1(8929.29,2370)
XSIG070255: C343.1 R896.2 TP6.1 TP907.1 | length 346.3
  Top Layer w10: TP6.1@8740,1970 8740,1862.54 8792.54,1810 C343.1@8820,1810 R896.2@8890,1810
  Bottom Layer w10: TP6.1@8740,1970 8745,1975 TP907.1@8805,1975
XSIG070256: C344.1 R895.2 TP5.1 TP908.1 | length 430.4
  Top Layer w10: TP5.1@8710,2410 8751,2369 8751,2200.71 8750.29,2200 C344.1@8720,2200 R895.2@8720,2140
  Bottom Layer w10: TP5.1@8710,2410 8710,2511.22 8713.78,2515 TP908.1@8720,2515
XSIG070260: R838.1 TP909.1 U12.14 | length 244.5
  Top Layer w10: U12.14@9008.39,2271.3 9008.39,2203.73 v1(9012.8,2199.32)
  Bottom Layer w10: R838.1@8970,2280 9012.8,2280 ; v1(9012.8,2199.32) 9012.8,2280 ; TP909.1@9055,2285 9055,2281.38 9012.8,2281.38 9012.8,2280
XSIG070261: R837.1 TP910.1 U12.7 | length 375.4
  Top Layer w10: U12.7@9008.39,2008.7 9008.39,2086.51 9005.57,2089.32 v1(9005.57,2119.32) 9005.57,2124.5 9053.42,2124.5 9070.1,2107.82 9070.1,2085.86 9081.85,2074.12 9136.97,2074.12 9152.85,2090 R837.1@9160,2090
  Bottom Layer w10: TP910.1@8995,2060 8995,2108.75 v1(9005.57,2119.32)
XSIG070270: R899.1 TP911.1 U15.2 U15.3 | length 514.7
  Top Layer w10: R899.1@3000,2310 3171.93,2310 3180.63,2318.7 3220.43,2318.7 ; U15.2@3220.43,2258.7 3220.43,2318.7 ; v1(3235,2354.63) 3246.02,2343.6 3246.02,2318.7 ; U15.3@3246.02,2258.7 3246.02,2318.7 ; 3220.43,2318.7 3246.02,2318.7
  Bottom Layer w10: TP911.1@3235,2250 v1(3235,2354.63)
XSIG070272: R900.1 TP912.1 U15.4 U15.5 | length 559.2
  Top Layer w10: R900.1@3000,2240 3040.01,2240 v1(3060,2220) 3081.31,2198.7 3271.61,2198.7 U15.4@3271.61,2258.7 3274.2,2261.29 3274.2,2309.91 3282.99,2318.7 3297.2,2318.7 U15.5@3297.2,2258.7
  Bottom Layer w10: TP912.1@3005,2180 3045,2220 v1(3060,2220)
XSIG070274: R901.1 TP913.1 U15.16 U15.17 | length 603.9
  Top Layer w10: R901.1@3000,2440 3001,2440 3068.95,2372.05 3184.75,2372.05 3235.96,2423.26 v1(3285,2423.26) 3271.61,2436.65 3271.61,2450.62 ; U15.17@3271.61,2521.3 3271.61,2450.62 ; U15.16@3297.2,2521.3 3297.2,2462.61 3285.21,2450.62 3271.61,2450.62
  Bottom Layer w10: v1(3285,2423.26) TP913.1@3285,2500
XSIG070276: R902.1 TP914.1 U15.18 U15.19 | length 540.2
  Top Layer w10: R902.1@3000,2560 3030.09,2560 3046.87,2543.22 3046.87,2514.13 3160.29,2400.71 3172.32,2400.71 v1(3172.32,2402.05) 3220.43,2450.16 3220.43,2460.25 ; U15.19@3220.43,2521.3 3220.43,2460.25 ; U15.18@3246.02,2521.3 3246.02,2465.03 3241.24,2460.25 3220.43,2460.25
  Bottom Layer w10: TP914.1@3130,2445 3172.32,2402.68 v1(3172.32,2402.05)
XSIG070279: C347.1 R900.2 TP8.1 TP915.1 | length 281.9
  Top Layer w10: TP8.1@2820,2200 2877,2200 2897,2180 C347.1@2940,2180 R900.2@3000,2180
  Bottom Layer w10: TP915.1@2745,2245 2775,2245 TP8.1@2820,2200
XSIG070280: C348.1 R899.2 TP7.1 TP916.1 | length 271.6
  Top Layer w10: TP7.1@2820,2350 2877,2350 2897,2370 C348.1@2940,2370 R899.2@3000,2370
  Bottom Layer w10: TP7.1@2820,2350 2840,2370 TP916.1@2840,2425
XSIG070284: R840.1 TP917.1 U15.14 | length 374.3
  Top Layer w10: U15.14@3348.39,2521.3 3348.39,2575.42 3373.16,2600.2 3471.74,2600.2 3496.42,2575.51 v1(3525,2575.51) 3525,2545.51 3530,2540.51 R840.1@3530,2510
  Bottom Layer w10: TP917.1@3525,2520 v1(3525,2575.51)
XSIG070285: R839.1 TP918.1 U15.7 | length 358.1
  Top Layer w10: U15.7@3348.39,2258.7 3348.39,2318.7 3439.37,2318.7 3448.07,2310 R839.1@3530,2310 v1(3530,2251.05)
  Bottom Layer w10: v1(3530,2251.05) TP918.1@3530,2305
XSIG070301: C311.1 R1318.1 R1319.2 TP919.1 U21.3 | length 642
  Top Layer w10: C311.1@7565,2800 7531.84,2800 7513.32,2818.53 7513.32,2939.09 7524.22,2950 R1318.1@7565,2950 7565,3035 R1319.2@7560,3040 7597.98,3040 v1@7631.35,3006.63 ; v1(7619.89,3014.2) 7619.89,3006.63 v1@7631.35,3006.63 ; U21.3@7705,3090 7705,3040 7671.63,3006.63 v1@7631.35,3006.63
  Bottom Layer w10: TP919.1@7565,3030 7596.52,3030 7619.89,3006.63 v1(7619.89,3014.2)
XSIG070302: C310.1 R1318.2 R1320.2 TP920.1 U21.5 | length 395.6
  Top Layer w10: R1318.2@7565,2890 7596.53,2890 7611.73,2874.81 7611.73,2857.11 v1(7617.11,2857.11) 7617.11,2811.57 7629.02,2799.66 7650,2799.66 R1320.2@7650,2800 ; U21.5@7655,2890 7650,2885 R1320.2@7650,2800 ; C310.1@7720,2800 R1320.2@7650,2800
  Bottom Layer w10: TP920.1@7565,2805 v1(7617.11,2857.11)
XSIG070314: C772.1 TP921.1 U22.14 | length 322.1
  Top Layer w10: v1(2271.28,327.64) 2271.28,297.64 2275,293.93 U22.14@2275,220
  Bottom Layer w10: C772.1@2265,270 2265,321.36 v1(2271.28,327.64) 2271.28,341.18 2299.36,369.26 2336.62,369.26 2345.87,360 TP921.1@2395,360
XSIG070315: C772.2 R764.2 TP922.1 U22.15 | length 328.6
  Top Layer w10: U22.15@2325,220 v1(2325,338.45)
  Bottom Layer w10: v1(2325,338.45) 2335,328.45 C772.2@2335,272.5 ; C772.2@2335,270 C772.2@2335,272.5 ; TP922.1@2405,230 2410,235 2410,273.65 ; R764.2@2410,290 2410,273.65 ; C772.2@2335,272.5 2336.15,273.65 2410,273.65
XSIG070317: C773.1 TP923.1 U22.6 | length 254.3
  Top Layer w10: v1(2125,340.95) U22.6@2125,420
  Bottom Layer w10: v1(2125,340.95) 2135,350.95 C773.1@2135,410 2135,497.76 2130,502.76 TP923.1@2130,510
XSIG070318: C773.2 R1345.2 TP924.1 U22.7 | length 350.4
  Top Layer w10: v1(2065,342.21) 2065,360 2075,370 U22.7@2075,420
  Bottom Layer w10: TP924.1@2030,505 1980,455 R1345.2@1980,410 C773.2@2065,410 v1(2065,342.21)
XSIG070327: D51.1 R1082.2 TP1682.1 | length 359.2
  Top Layer w10: v1(8505.96,348.59) 8505.96,448.46 8531,473.5 D51.1@8570,473.5 R1082.2@8570,580
  Bottom Layer w10: v1(8505.96,348.59) 8518.32,348.59 8564.86,395.14 TP1682.1@8565,395
XSIG070330: D67.1 R1095.2 TP1683.1 | length 231.5
  Top Layer w10: D67.1@8360,473.5 R1095.2@8360,580 8360,590.87 v1(8415,590.87)
  Bottom Layer w10: v1(8415,590.87) TP1683.1@8415,650
XSIG070340: D52.1 R1083.2 TP1670.1 | length 356.4
  Top Layer w10: D52.1@2710,716.5 2710,738.94 2721.06,750 2756.02,750 ; v1(2743.03,871.57) 2756.02,858.59 2756.02,750 ; R1083.2@2800,750 2756.02,750
  Bottom Layer w10: v1(2743.03,871.57) 2743.03,858.08 2796.11,805 TP1670.1@2820,805
XSIG070341: D68.1 R1096.2 TP1669.1 | length 206.1
  Top Layer w10: R1096.2@2560,730 2573.5,716.5 D68.1@2630,716.5 2622.8,709.3 v1(2622.8,658.03)
  Bottom Layer w10: v1(2622.8,658.03) 2640,675.23 TP1669.1@2640,720
XSIG070363: C345.1 R902.2 TP925.1 | length 188.9
  Top Layer w10: v1(2945,2688.43) 2945,2658.43 2940,2653.43 C345.1@2940,2620 R902.2@3000,2620
  Bottom Layer w10: TP925.1@2945,2630 v1(2945,2688.43)
XSIG070364: C346.1 R901.2 TP926.1 | length 162.5
  Top Layer w10: v1(2895.82,2490) 2905.82,2500 C346.1@2940,2500 R901.2@3000,2500
  Bottom Layer w10: v1(2895.82,2490) TP926.1@2950,2490
XSIG070365: C342.1 R897.2 TP927.1 | length 180
  Top Layer w10: R897.2@8990,2470 v1(9042.48,2470)
  Bottom Layer w10: TP927.1@8995,2540 8990,2540 C342.1@8990,2470 v1(9042.48,2470)
XSIG070366: C341.1 R898.2 TP928.1 | length 174.7
  Top Layer w10: R898.2@8880,2470 v1(8924.85,2470)
  Bottom Layer w10: TP928.1@8875,2550 8880,2550 C341.1@8880,2470 v1(8924.85,2470)
XSIG081871: C429.1 C438.1 C470.1 C471.1 TP929.1 U16.4 | length 567.8
  Top Layer w10: v1(10166.22,783.13) 10183.09,800 C471.1@10230,800 C470.1@10300,800 10300,801.5 10345,846.5 10395,846.5 ; U16.4@10395,900 10395,846.5 ; C429.1@10510,800 C438.1@10440,800 10440,801.5 10395,846.5
  Bottom Layer w10: v1(10166.22,783.13) 10229.29,783.13 10239.62,793.47 10272.78,793.47 10275,795.68 TP929.1@10275,805
XSIG081875: C470.2 C471.2 R743.1 TP1610.1 | length 282.9
  Top Layer w10: v1(10178.59,734.9) 10193.9,734.9 10199,740 C471.2@10230,740 C470.2@10300,740 10300,741.5 10332.89,774.39 10343.39,774.39 10369,800 R743.1@10370,800
  Bottom Layer w10: TP1610.1@10115,735 10178.49,735 v1(10178.59,734.9)
XSIG081877: C308.1 C1144.1 L6.1 L10.2 R711.1 TP1611.1 | length 1335.3
  Bottom Layer w20: v1(9739.3,776.49) 9739.3,851.65 9802.04,914.39 10146.85,914.39 10176.24,885 TP1611.1@10450,885 10459,885 10474,900 R711.1@10510,900
  Bottom Layer w30: v1(9739.3,776.49) 9779.3,776.49 9800,755.79 C308.1@9800,380
XSIG081889: R711.2 R964.2 TP930.1 U16.5 | length 319.2
  Top Layer w10: U16.5@10395,1100 10395,1079.98 10431.5,1079.98 v1(10455.35,1056.13)
  Bottom Layer w20: TP930.1@10400,1115 10430.6,1084.4 10430.6,1080.88 v1(10455.35,1056.13) 10461.37,1056.13 10467.5,1050 R964.2@10510,1050 R711.2@10510,960
XSIG081898: D1.1 D3.1 R984.1 TP931.1 | length 910.5
  Top Layer w30: D3.1@10467.5,1320 10467.5,1392.43 10529.22,1454.15 10529.22,1839.68 10518.9,1850 v1(10478.9,1850)
  Bottom Layer w20: R984.1@10330,1850 v1(10478.9,1850) ; TP931.1@10470,2445 10501.95,2445 10532.51,2414.44 10532.51,2328.21 v1(10532.17,2328.21)
XSIG081921: D2.1 L10.1 TP932.1 U16.1 | length 321.7
  Top Layer w20: 10165.52,1113.33 10198.55,1080.31 10198.55,950 10212.58,935.98 10236.55,935.98 10245,927.53 U16.1@10245,900
  Bottom Layer w10: TP932.1@10045,1175 10045,1226.88 v1(10051.7,1233.58)
XSIG081929: D7.2 TP933.1 U19.5 | length 339.8
  Top Layer w10: D7.2@5368.5,702.5 5417.63,702.5 5512.19,607.94 v1@5545,607.94 ; U19.5@5545,550 v1@5545,607.94 ; v1(5545,612.07) v1@5545,607.94
  Bottom Layer w10: TP933.1@5545,550 v1(5545,612.07)
XSIG081930: C325.2 R760.1 R970.2 TP934.1 U19.4 | length 357.9
  Top Layer w10: U19.4@5545,750 5545,678.93 v1(5551.86,672.07)
  Bottom Layer w10: R970.2@5420,730 R970.2@5420,729.13 ; TP934.1@5425,650 5425,687.5 5420,692.5 R970.2@5420,729.13 ; v1(5551.86,672.07) 5560,680.21 R760.1@5560,720 C325.2@5490,720 5429.13,720 R970.2@5420,729.13
XSIG081935: D5.3 D6.3 R1053.2 TP413.1 | length 2578.9
  Top Layer w10: D5.3@5451.5,500 5517.85,500 5547.85,470 R1053.2@5590,470 5590,432.11 5643.93,378.18 6787.61,378.18 6845,435.56 6845,608.64 6788.88,664.76 v1(6754.56,664.76)
  Bottom Layer w10: v1(6754.56,664.76) 6754.56,805.1 6705,854.66 TP413.1@6705,1000 6705,1174.27 6870.73,1340 D6.3@6908.5,1340
XSIG081939: C515.1 D5.1 R663.2 R1048.1 R1052.1 TP935.1 | length 582.7
  Top Layer w10: C515.1@5260,480 R663.2@5260,589.36 ; R663.2@5260,590 R663.2@5260,589.36 ; R1052.1@5360,610 5360,589.36 ; v1(5471.41,575.01) 5433.89,537.5 D5.1@5368.5,537.5 5368.5,570.5 5360,579 5360,589.36 ; R663.2@5260,589.36 5360,589.36
  Bottom Layer w10: TP935.1@5375,580 5377.78,577.22 5430,577.22 ; R1048.1@5430,500 5430,577.22 ; v1(5471.41,575.01) 5471.41,577.85 5430,577.85 5430,577.22
XSIG081942: R1053.1 TP936.1 U19.7 | length 234
  Top Layer w10: R1053.1@5650,470 5650,545 U19.7@5645,550 5645,617.41 v1(5650,622.41)
  Bottom Layer w10: TP936.1@5650,545 v1(5650,622.41)
XSIG081946: C513.1 D6.1 R746.2 R1049.1 R1051.1 TP937.1 | length 524.1
  Bottom Layer w10: D6.1@6991.5,1377.5 7046.95,1377.5 7070.22,1354.23 7114.27,1354.23 7118.5,1350 C513.1@7120,1350 7120,1368.25 7143.16,1391.41 7165.6,1391.41 7180,1405.81 R746.2@7180,1429 ; R1051.1@7170,1510 7174.22,1510 7174.22,1430 R746.2@7180,1430 R746.2@7180,1429 ; R1049.1@7268.57,1347 7268.57,1378 7275,1384.42 TP937.1@7275,1415 7275,1423.16 7185.84,1423.16 R746.2@7180,1429
XSIG082003: D45.2 R865.1 TP938.1 | length 182.9
  Top Layer w10: D45.2@5850,1543.5 D45.2@5850,1558.5 ; R865.1@5850,1620 D45.2@5850,1558.5 ; v1(5901.69,1561.12) 5892.62,1561.12 5890,1558.5 D45.2@5850,1558.5
  Bottom Layer w10: TP938.1@5860,1590 5884.75,1565.25 5897.55,1565.25 v1(5901.69,1561.12)
XSIG082004: D45.1 Q48.3 TP939.1 | length 257.4
  Top Layer w10: v1(5745,1464.32) 5788.59,1464.32 5796.41,1456.5 D45.1@5850,1456.5
  Bottom Layer w10: v1(5745,1464.32) 5745,1465 v1@5750,1465 ; Q48.3@5750,1548.5 v1@5750,1465 ; TP939.1@5810,1465 v1@5750,1465
XSIG082006: Q48.1 R1102.2 TP940.1 | length 258.3
  Bottom Layer w10: TP940.1@5645,1465 5631.8,1465 5631.8,1518.2 R1102.2@5620,1530 5680.42,1530 5712.5,1562.08 Q48.1@5712.5,1631.5
XSIG082011: R619.1 R620.1 R621.1 R622.1 TP412.1 Y1.3 | length 4218.8
  Top Layer w20: v1(4881.75,882.42) 4962.19,882.42 4990,854.61 Y1.3@4990,817.5
  Bottom Layer w10: R621.1@3320,1610 3892.16,1610 3922.92,1579.24 4327.42,1579.24 4560.02,1346.64 4840,1346.64 ; R620.1@4840,1160 TP412.1@4840,1265 4840,1346.64 ; R622.1@6490,1520 R619.1@6490,1600 6413.92,1600 6383.31,1630.61 6252.67,1630.61 6245.48,1637.8 6067.8,1637.8 5776.64,1346.64 4840,1346.64
  Bottom Layer w15: R620.1@4840,1160 4899.19,1160 4942.55,1116.64 4942.55,943.22 v1(4881.75,882.42)
XSIG082016: C312.1 L9.2 TP941.1 Y1.4 | length 345.7
  Top Layer w10: Y1.4@5190,817.5 5282.87,817.5 5302.7,837.33 5302.7,840.29 v1(5314.54,852.13)
  Bottom Layer w10: L9.2@5190,814.5 5270,814.5 C312.1@5270,820 5270,852.13 ; TP941.1@5270,895 5270,852.13 ; v1(5314.54,852.13) 5270,852.13
XSIG082104: D50.2 R1081.1 TP942.1 | length 186.4
  Top Layer w10: R1081.1@7040,3670 7022.5,3670 7022.5,3712.11 7029.57,3719.18 v1(7046.88,3719.18) 7050.05,3719.18 7050.05,3765.59 D50.2@7050,3765.59
  Bottom Layer w10: v1(7046.88,3719.18) 7055.82,3719.18 7060,3715 TP942.1@7095,3715
XSIG082118: C517.1 R989.2 R990.2 TP943.1 U28.2 | length 381.7
  Top Layer w10: C517.1@250,1490 R989.2@250,1560 R990.2@250,1630 255,1630 U28.2@255,1720 255,1770 v1(268.66,1783.67)
  Bottom Layer w10: TP943.1@250,1725 268.61,1725 268.61,1783.72 v1(268.66,1783.67)